# Altium PCB DigitalLabBoard-CS.PcbDoc (part 3 of 3)
Units mm, origin at the board's own origin, x right, y up, seen from the top; angles counter-clockwise.
Board outline 155 x 110 mm, 2 copper layers (Top Layer, Bottom Layer), stack 1.571 mm thick; 189 components, 184 nets, 775 pads, 859 vias.
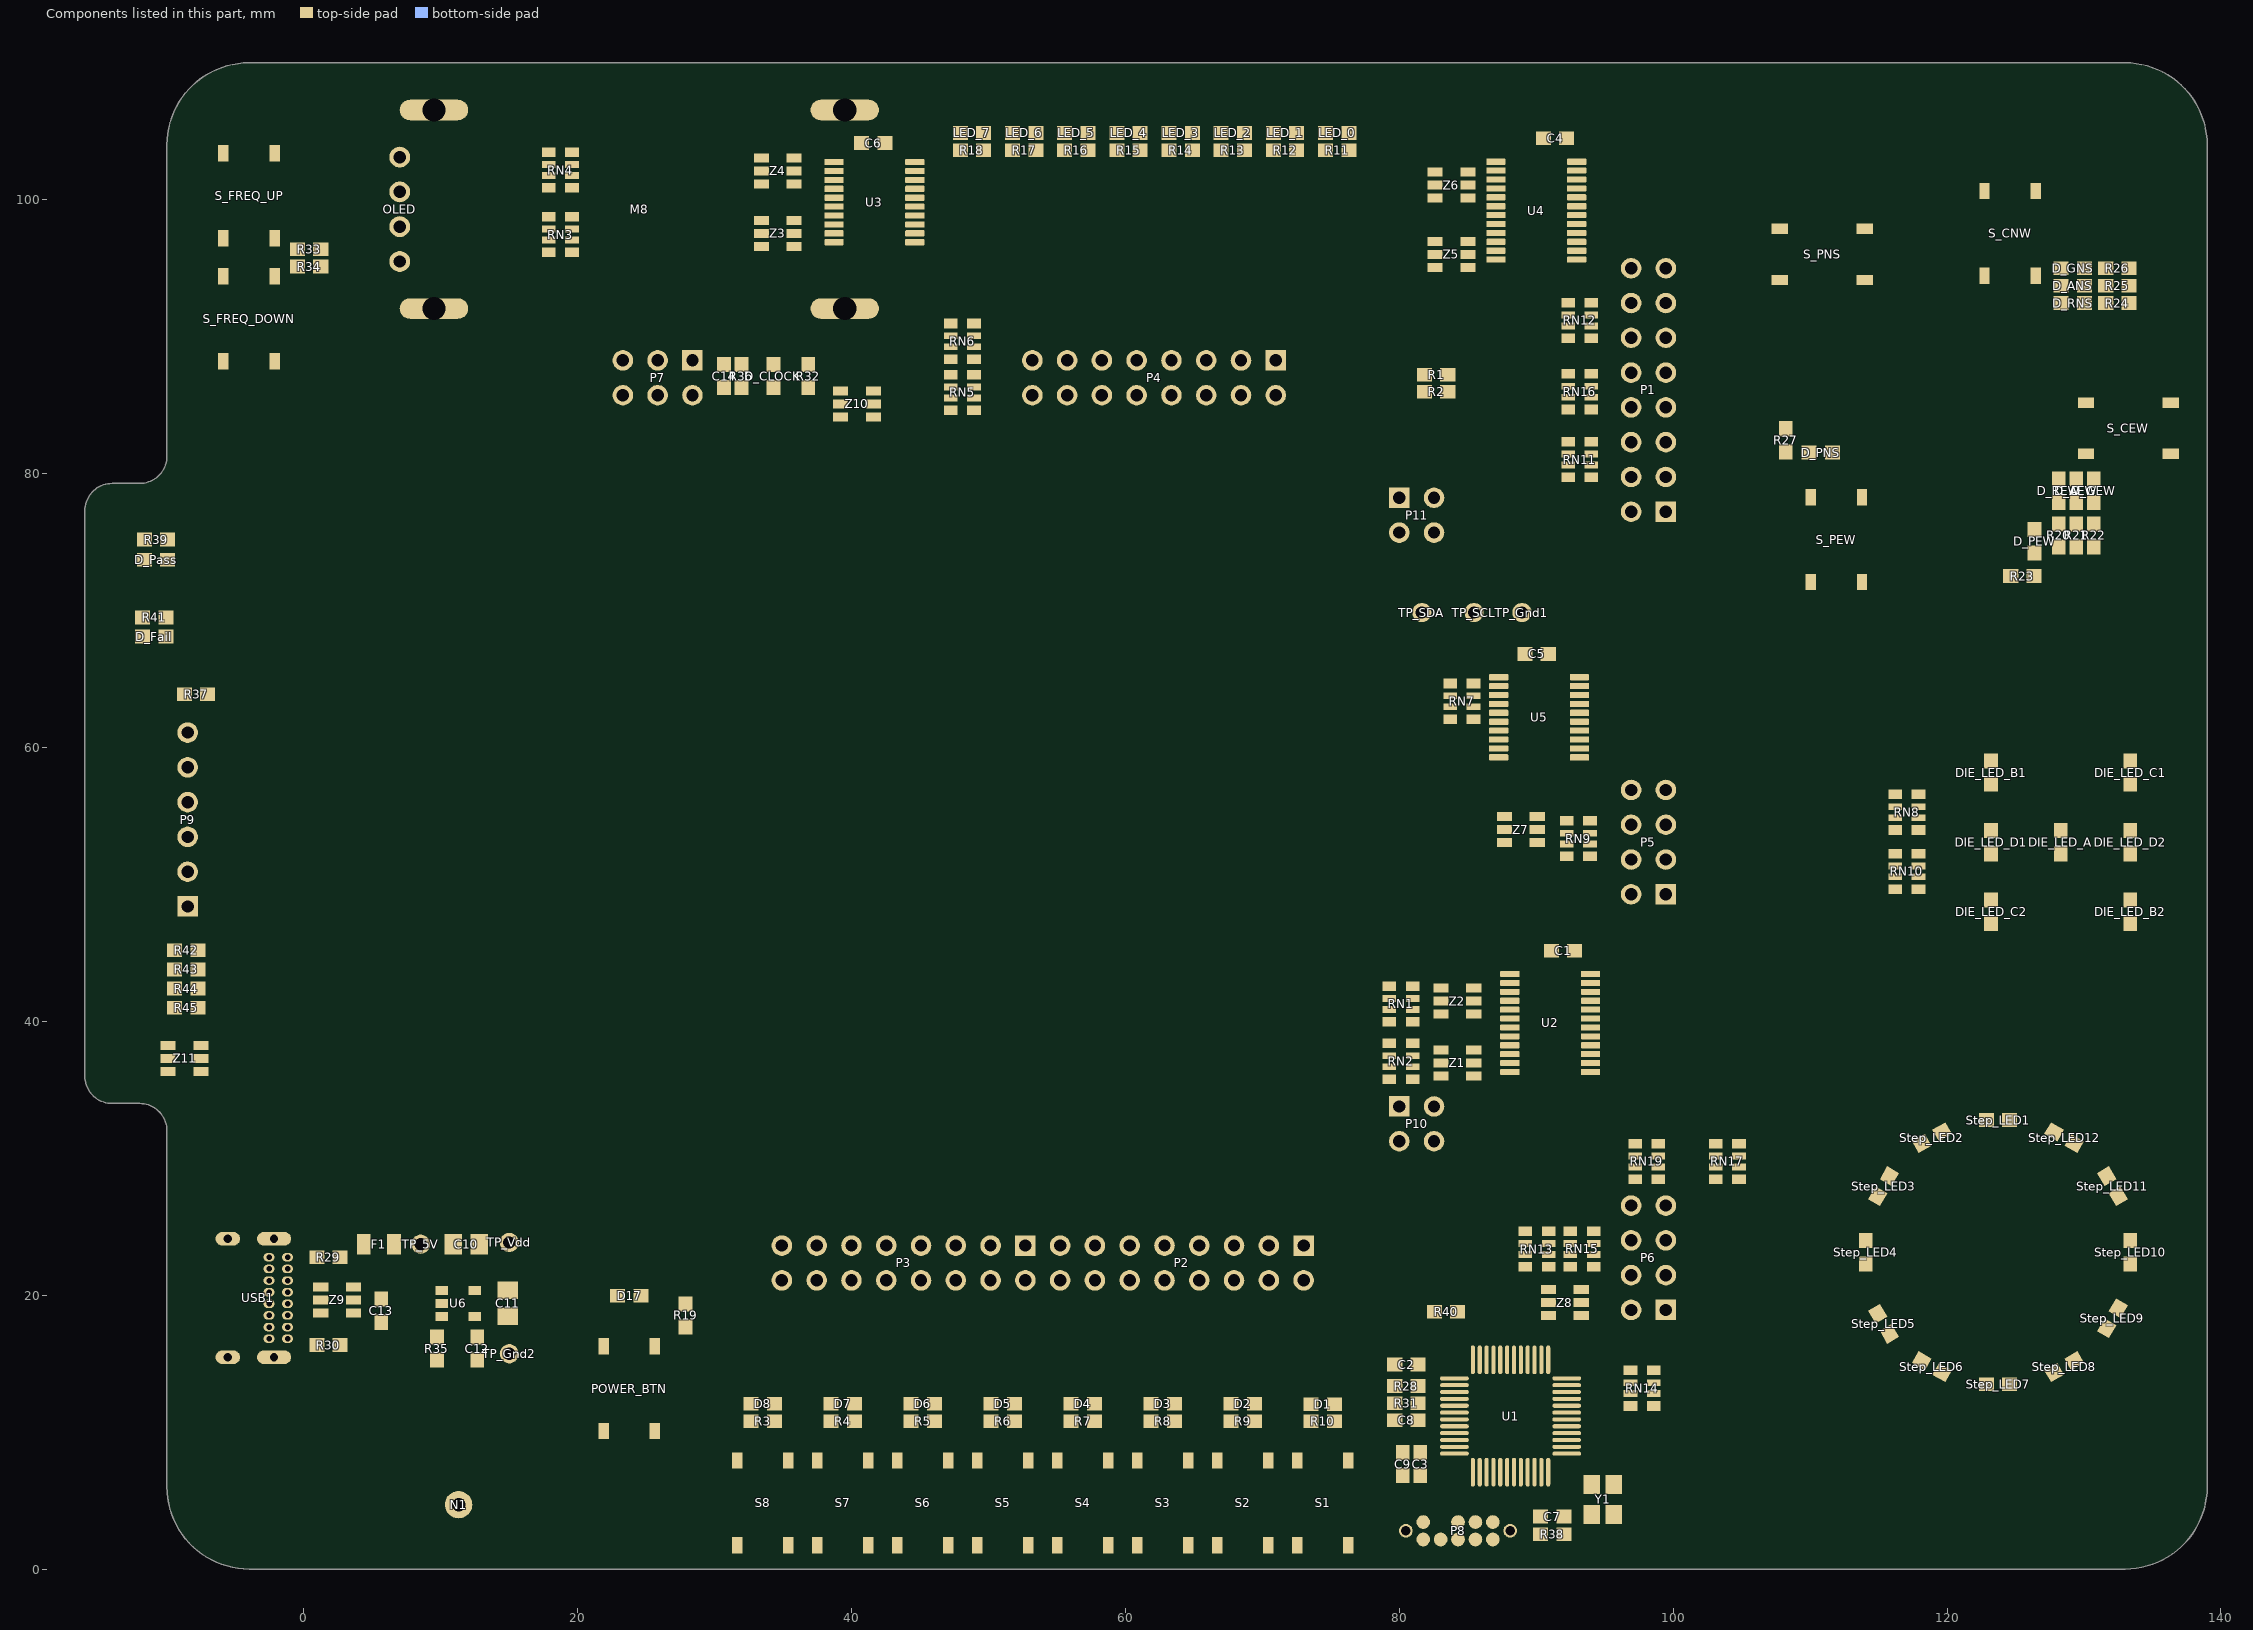
[diagram p3: the components of this part, seen from the top]

## Silkscreen, mask and mechanical layers (free items; w line width, h text height)
Top Overlay:
  drawing of 253 lines, arcs and shapes, not listed
  text "Traffic" at 97.434,103.504 h2.54
  text "7" at 48.245,99.567 h2.03
  text "6" at 51.928,99.567 h2.03
  text "5" at 55.738,99.567 h2.03
  text "4" at 59.548,99.567 h2.03
  text "3" at 63.358,99.567 h2.03
  text "2" at 67.168,99.567 h2.03
  text "1" at 71.359,99.567 h2.03
  text "0" at 74.788,99.567 h2.03
  text "0" at 102.895,94.792 h1.52 r90
  text "North St" at 118.515,92.645 h1.52 r90
  text "1" at 102.768,91.82 h1.52 r90
  text "0" at 102.895,89.712 h1.52 r90
  text "East St" at 128.359,89.408 h1.52
  text "LIGHTS" at 105.435,87.121 h1.52 r90
  text "1" at 102.768,86.74 h1.52 r90
  text "Clock" at 8.057,85.725 h2.54
  text "CAR" at 105.562,81.533 h1.52 r90
  text "Vdd" at 85.253,77.367 h1.78
  text "PED" at 105.562,76.199 h1.52 r90
  text "Gnd" at 85.253,74.853 h1.78
  text "Pass" at -13.589,70.993 h1.52
  text "Fail" at -13.208,65.024 h1.52
  text "Dice" at 98.196,62.991 h2.54
  text "VDD" at -14.549,60.266 h1.52
  text "A" at 111.658,58.761 h2.54
  text "GND" at -14.549,57.726 h1.52
  text "TCK" at -14.549,55.186 h1.52
  text "B" at 111.658,54.189 h2.54
  text "TDO" at -14.549,52.646 h1.52
  text "TDI" at -14.549,50.106 h1.52
  text "C" at 111.658,49.871 h2.54
  text "TMS" at -14.549,47.566 h1.52
  text "D" at 111.658,45.299 h2.54
  text "Stepper" at 98.196,33.452 h2.54
  text "Vdd" at 85.253,32.92 h1.78
  text "Gnd" at 85.253,30.406 h1.78
  text "PH0" at 103.784,25.526 h1.91
  text "PH1" at 103.784,22.986 h1.91
  text "PH2" at 103.784,20.446 h1.91
  text "PH3" at 103.784,17.906 h1.91
  text "7" at 33.005,13.207 h2.03
  text "6" at 38.847,13.207 h2.03
  text "5" at 44.689,13.207 h2.03
  text "4" at 50.531,13.207 h2.03
  text "3" at 56.373,13.207 h2.03
  text "2" at 62.215,13.207 h2.03
  text "1" at 68.311,13.207 h2.03
  text "0" at 73.899,13.207 h2.03
  text "Gnd" at 8.526,10.055 h2.03
  text "Swinburne University" at 97.699,5.282 h2.03
  text "www.swin.edu.au" at 97.699,2.488 h2.03
Bottom Overlay:
  drawing of 8 lines, arcs and shapes, not listed
  text "DIGITAL ELECTRONICS DESIGN" at 73.899,75.945 h2.54
  text "SWINBURNE UNIVERSITY OF TECHNOLOGY" at 73.772,64.896 h2.54
  text "Vref" at -2.819,60.452 h1.27
  text "Gnd" at -3.547,57.915 h1.27
  text "TCK" at -3.547,55.375 h1.27
  text "TDO" at -3.547,52.835 h1.27
  text "TDI" at -3.547,50.295 h1.27
  text "Based on a design by / Jordan Boekel, Ben Gregg, Patrick Curtain" at 57.023,48.387 h2.54
  text "TMS" at -3.547,47.755 h1.27
  text "Ver = '.Version'" at 20.686,46.481 h1.52
  text "If found please call (+613) 9214 8319" at 88.504,38.734 h2.54
Mechanical 1:
  lines w0.152: -13.604,54.736 30.973,54.736
  lines w0.254: 29.602,4.952 31.202,4.952 ; 89.179,22.732 98.069,22.732 ; 89.56,50.291 98.196,50.291 ; 90.703,91.185 98.196,91.185 ; 92.608,77.215 98.196,77.215
Mechanical 15:
  lines w0.254: 31.735,16.89 76.439,16.89 ; 98.069,82.295 120.294,82.295 ; 98.958,50.291 127.66,50.291 ; 101.625,22.732 119.024,22.732 ; 121.183,22.732 126.263,22.732 ; 121.31,82.295 123.85,82.295 ; 122.58,81.025 122.58,83.565 ; 123.723,20.192 123.723,25.272

## Dimensions
-14,34 to -4,0 on Mechanical 1
-16,110 to -12,79.28 on Mechanical 1
-10,32 to -16,36 on Mechanical 1
41.417,54.736 to 79.995,33.781 on Mechanical 1
41.417,54.736 to 79.995,75.691 on Mechanical 1
79.995,75.691 to 79.995,33.781 on Mechanical 1
-16,77.28 to 139,104 on Mechanical 1
-4,110 to -4,0 on Mechanical 1

## Text inside footprints (layer, text, board x,y; h text height)
JLC_Serial_Number: Top Overlay "JLCJLCJLCJLC" at 46.228,37.465 h2
Logo: Bottom Overlay "o" at 70.012,54.839 h10.16; Bottom Overlay "OSHW" at 73.466,57.455 h0.76
OLED: Top Overlay "SDA" at 8.27,102.604 h1.02; Top Overlay "SCL" at 8.27,100.064 h1.02; Top Overlay "Vcc" at 8.27,97.524 h1.02; Top Overlay "GND" at 8.27,94.984 h1.02